# EAGLE board Christmas_tree_PCB (EAGLE 9.2.0)
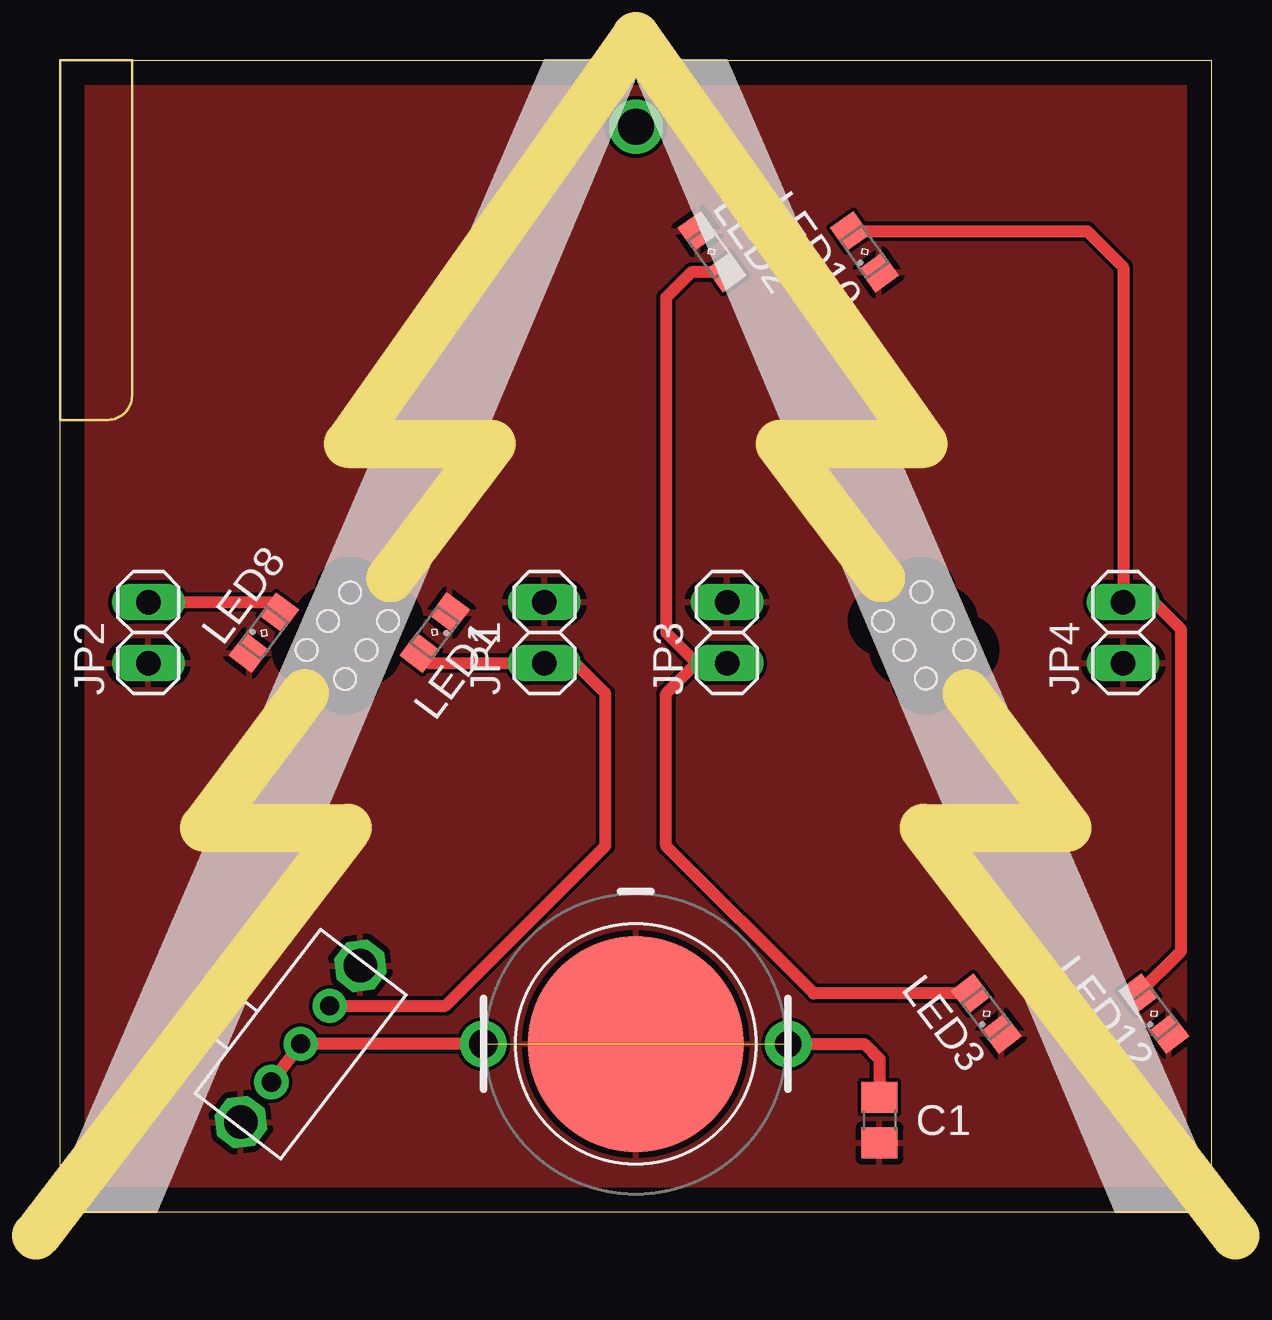
[diagram p0: board, top side]
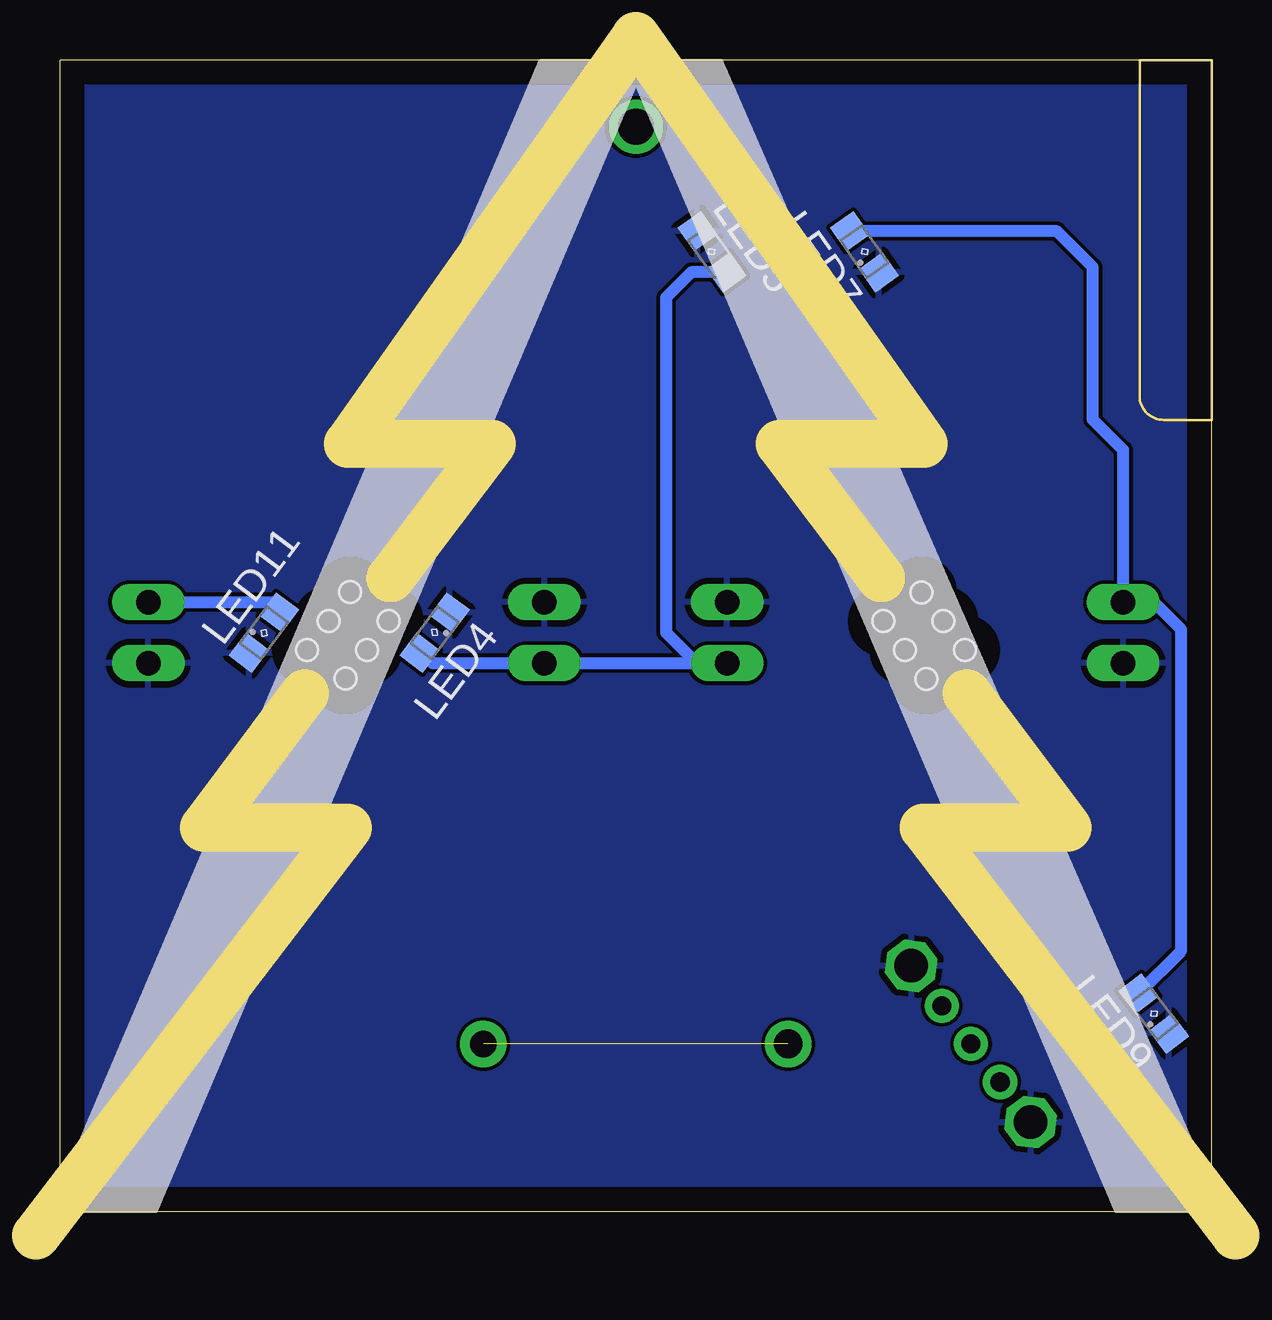
[diagram p1: board, bottom side, seen from below]

Size 48 x 48 mm. Coordinates in mm from the lower left corner, seen from the top.
Outline: 0,0 48,0 48,48 0,48 0,0
Copper layers (1*16): Top 0.035mm / dielectric 1.5mm / Bottom 0.035mm
Design rules "default": minimum track width 6mil, minimum drill 0.35mm, track to track 6mil, track to pad 6mil, pad to pad 6mil, via to via 6mil, smd to smd 6mil, copper to edge 40mil, drill to drill 6mil, minimum pad ring 10mil, minimum via ring 8mil, stop-mask expansion 4mil, vias tented up to drill 0mil, thermal gap 10mil
Holes 0.9 mm at 11.19,24.61 12.79,23.41 10.29,23.4 11.89,22.21 13.69,24.61 12.09,25.81 36.8,24.61 35.2,23.41 35.9,25.81 34.3,24.62 36.1,22.21 37.7,23.41
tKeepout: 10 lines
bKeepout: 10 lines
Milling: area 0,33 to 3,48; 12 lines

## Footprints (pad centres in the part's own frame; a part is rotated, then mirrored left to right if it is on the bottom)
C0805 = smd 1.3 x 1.5: 1 -0.95,0; 2 0.95,0
1X02 = drill 1.016 long: 1 -1.27,0; 2 1.27,0
SML0805 = smd 1.2 x 1.2: A 1.05,0; C -1.05,0
CR1220_METAL_HOLDER = drill 1.2 pad 1.93: P$1 -6.35,0 | drill 1.1 pad 1.93: P$2 6.35,0 | smd 9 x 9: P$3 0,0
SK-12D07 = drill 0.8 pad 1.422: P$1 -2,0; P$2 0,0; P$3 2,0 | drill 1.4 octagon: P$4 -4.1,0; P$5 4.1,0

## Placement (x,y rotation side)
C1  10uf  [C0805]  34.16,3.81 270 top
JP1  [1X02]  20.19,24.13 90 top
JP2  [1X02]  3.68,24.13 90 top
JP3  [1X02]  27.81,24.13 90 top
JP4  [1X02]  44.32,24.13 90 top
LED1  [SML0805]  15.62,24.13 233.2 top
LED2  [SML0805]  27.18,40.01 305.2 top
LED3  [SML0805]  38.61,8.26 127.4 top
LED4  [SML0805]  32.38,24.13 233.2 bottom
LED5  [SML0805]  20.82,40.01 305.2 bottom
LED7  [SML0805]  14.47,40.01 125.2 bottom
LED8  [SML0805]  8.51,24.13 53.2 top
LED9  [SML0805]  2.41,8.26 127.4 bottom
LED10  [SML0805]  33.52,40.01 125.2 top
LED11  [SML0805]  39.49,24.13 53.2 bottom
LED12  [SML0805]  45.59,8.26 127.4 top
U$1  CR1220_METAL_HOLDER  [CR1220_METAL_HOLDER]  24,6.99 0 top
U$2  SK-12D07  [SK-12D07]  10.03,6.99 52.6 top

## Library data of the parts
C1 = resistor
JP1-JP4 = pinhead
LED1-LED5 LED7-LED12 = led
U$1 = sapin
U$2 = pins_fusee_esieespace

## Nets
GND: C1.2 JP1.2 JP2.1 JP3.2 JP4.1 LED1.C LED2.C LED3.C LED4.C LED5.C LED7.C LED8.C LED9.C LED10.C LED11.C LED12.C U$1.P$3 U$2.P$4 U$2.P$5
N$1: C1.1 U$1.P$1 U$1.P$2 U$2.P$1 U$2.P$2
N$2: JP2.2 LED7.A LED8.A LED9.A
N$3: JP4.2 LED10.A LED11.A LED12.A
N$6: JP1.1 JP3.1 LED1.A LED2.A LED3.A LED4.A LED5.A U$2.P$3

## Tracks (layer width: path | path; a pad name or v marks a point on that pad's centre or on a via)
GND
  pour Top: 49,-1 49,49 -1,49 -1,-1
  pour Bottom: 50,-2 50,50 -2,50 -2,-2
N$1  (1 unrouted)
  Top 0.508: U$1.P$1 U$2.P$2 U$2.P$1 | U$1.P$2 33.52,6.99 34.16,6.35 C1.1
N$2
  Top 0.508: JP2.2 8.76,25.4 9.13,25.02 LED8.A
  Bottom 0.508: LED7.A 6.44,40.86 4.95,39.37 4.95,33.02 3.68,31.75 JP2.2 2.41,25.4 1.27,24.26 1.27,10.87 LED9.A
N$3
  Top 0.508: LED10.A 42.83,40.86 44.32,39.37 JP4.2 45.59,25.4 46.73,24.26 46.73,10.87 LED12.A
  Bottom 0.508: LED11.A 39.04,25.4 JP4.2
N$4  (via drill 1.5 pad 1.7)
  other vias: 24,45.21
N$6
  Top 0.508: LED1.A 15.42,22.86 JP1.1 21.46,22.86 22.73,21.59 22.73,15.24 16.06,8.57 U$2.P$3 | LED3.A 31.42,9.09 25.27,15.24 25.27,21.59 26.54,22.86 | LED2.A 26.32,39.15 25.27,38.1 25.27,24.13 26.54,22.86 | JP3.1 26.54,22.86
  Bottom 0.508: LED4.A 32.45,22.86 JP3.1 21.46,22.86 | 21.46,22.86 JP1.1 | LED5.A 21.68,39.15 22.73,38.1 22.73,24.13 21.46,22.86